# EAGLE board 14061-gatorBytes_LED_board-Panel (EAGLE 9.1.0)
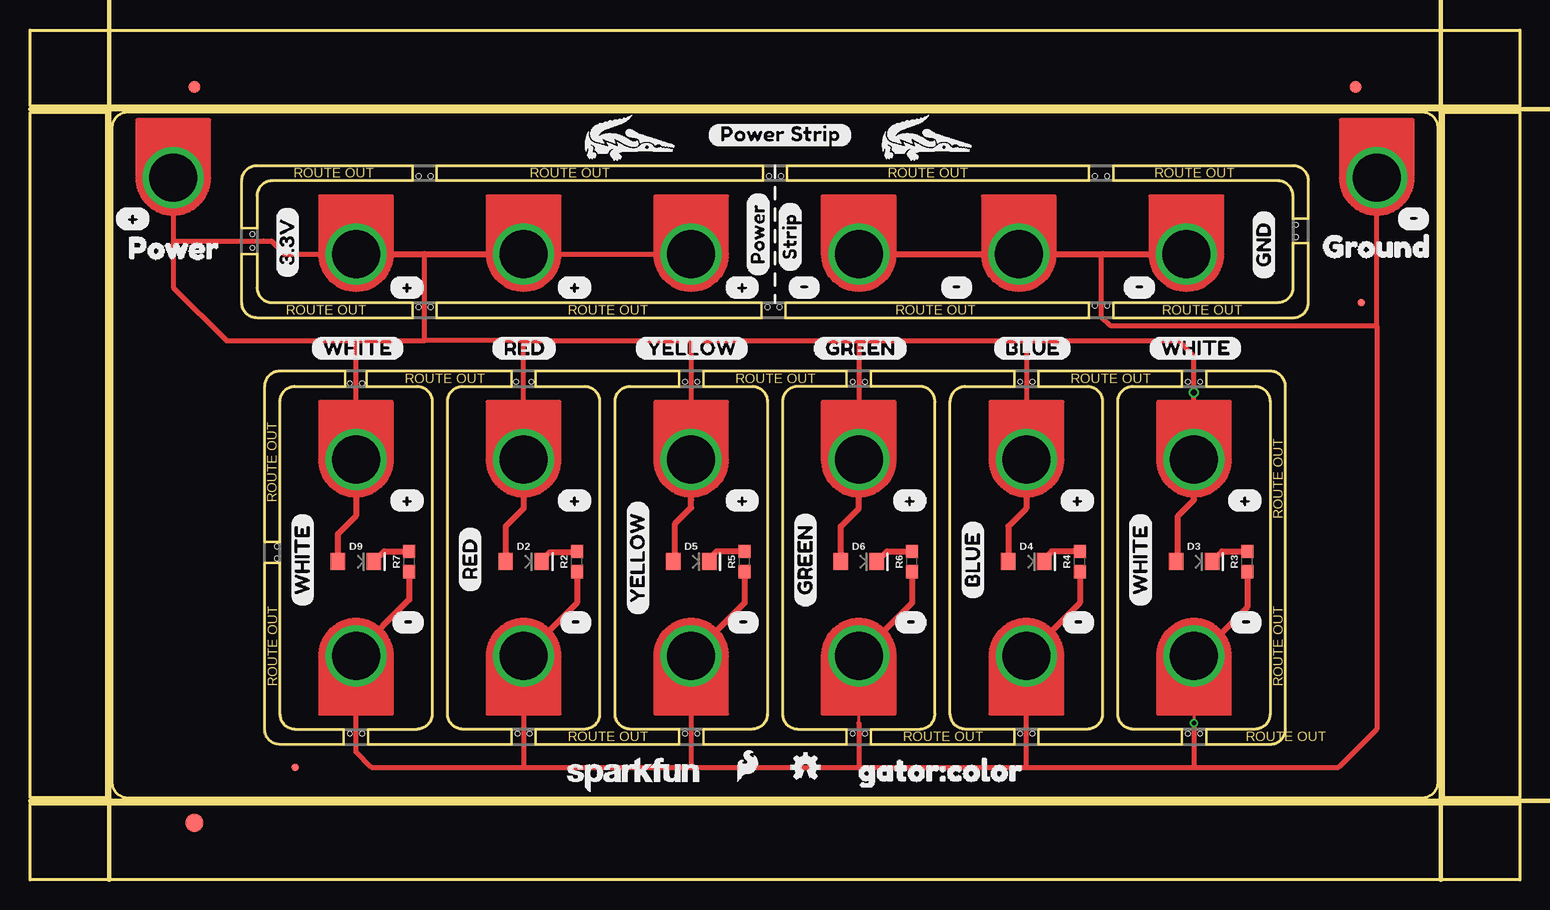
[diagram p0: board, top side]
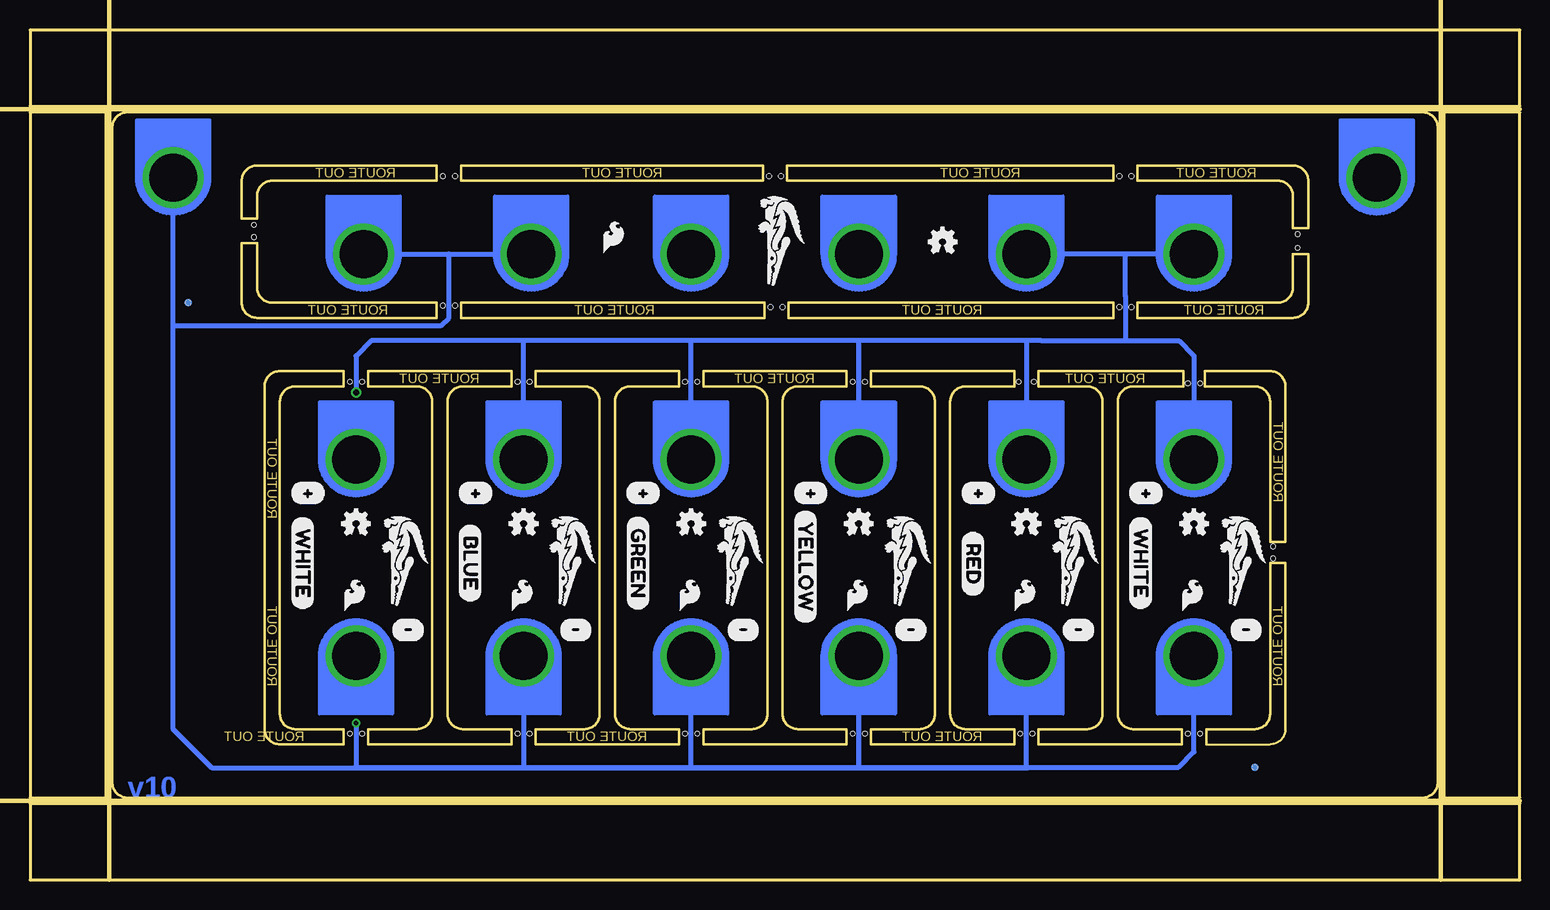
[diagram p1: board, bottom side, seen from below]

Size 124.21 x 70.87 mm. Coordinates in mm from the lower left corner, seen from the top.
Outline: 22.1,12.57 arc-90 20.83,13.84 20.83,26.42 19.56,26.42 19.56,12.57 arc90 20.83,11.3 26.16,11.3 26.16,12.57 22.1,12.57
Outline: 20.83,39.88 arc-90 22.1,41.15 26.29,41.15 26.29,42.42 20.83,42.42 arc90 19.56,41.15 19.56,28.19 20.83,28.19 20.83,39.88
Outline: 28.19,12.57 28.19,11.3 40.13,11.3 40.13,12.57 36.07,12.57 arc-90 34.8,13.84 34.8,39.88 arc-90 36.07,41.15 40.13,41.15 40.13,42.42 28.07,42.42 28.07,41.15 32.26,41.15 arc-90 33.53,39.88 33.53,13.84 arc-90 32.26,12.57 28.19,12.57
Outline: 6.86,8.13 6.86,62.74 arc-90 8.13,64.01 116.08,64.01 arc-90 117.35,62.74 117.35,8.13 arc-90 116.08,6.86 8.13,6.86 arc-90 6.86,8.13
Outline: 105.28,49.4 arc-90 104.01,48.13 90.3,48.13 90.3,46.86 105.28,46.86 arc90 106.55,48.13 106.55,53.09 105.28,53.09 105.28,49.4
Outline: 20.19,48.13 arc-90 18.92,49.4 18.92,52.2 17.65,52.2 17.65,48.13 arc90 18.92,46.86 31.88,46.86 31.88,48.13 20.19,48.13
Outline: 104.65,41.15 arc90 103.38,42.42 98.04,42.42 98.04,41.15 102.11,41.15 arc-90 103.38,39.88 103.38,13.84 arc-90 102.11,12.57 98.04,12.57 98.04,11.3 103.38,11.3 arc90 104.65,12.57 104.65,41.15
Outline: 42.16,12.57 42.16,11.3 54.1,11.3 54.1,12.57 50.04,12.57 arc-90 48.77,13.84 48.77,39.88 arc-90 50.04,41.15 54.1,41.15 54.1,42.42 42.16,42.42 42.16,41.15 46.23,41.15 arc-90 47.5,39.88 47.5,13.84 arc-90 46.23,12.57 42.16,12.57
Outline: 56.13,12.57 56.13,11.3 68.07,11.3 68.07,12.57 64.01,12.57 arc-90 62.74,13.84 62.74,39.88 arc-90 64.01,41.15 68.07,41.15 68.07,42.42 56.13,42.42 56.13,41.15 60.2,41.15 arc-90 61.47,39.88 61.47,13.84 arc-90 60.2,12.57 56.13,12.57
Outline: 70.1,12.57 70.1,11.3 82.04,11.3 82.04,12.57 77.98,12.57 arc-90 76.71,13.84 76.71,39.88 arc-90 77.98,41.15 82.04,41.15 82.04,42.42 70.1,42.42 70.1,41.15 74.17,41.15 arc-90 75.44,39.88 75.44,13.84 arc-90 74.17,12.57 70.1,12.57
Outline: 84.07,12.57 84.07,11.3 96.01,11.3 96.01,12.57 91.95,12.57 arc-90 90.68,13.84 90.68,39.88 arc-90 91.95,41.15 96.01,41.15 96.01,42.42 84.07,42.42 84.07,41.15 88.14,41.15 arc-90 89.41,39.88 89.41,13.84 arc-90 88.14,12.57 84.07,12.57
Outline: 33.91,48.13 33.91,46.86 60.96,46.86 60.96,48.13 33.91,48.13
Outline: 62.99,48.13 62.99,46.86 88.27,46.86 88.27,48.13 62.99,48.13
Outline: 17.65,54.36 18.92,54.36 18.92,57.02 arc-90 20.19,58.29 31.88,58.29 31.88,59.56 18.92,59.56 arc90 17.65,58.29 17.65,54.36
Outline: 33.91,58.29 33.91,59.56 61.09,59.56 61.09,58.29 33.91,58.29
Outline: 63.12,58.29 63.12,59.56 88.27,59.56 88.27,58.29 63.12,58.29
Outline: 90.3,58.29 90.3,59.56 105.28,59.56 arc-90 106.55,58.29 106.55,55.12 105.28,55.12 105.28,57.02 arc90 104.01,58.29 90.3,58.29
Outline: 0,6.35 124.21,6.35 124.21,0 0,0 0,6.35
Outline: 117.86,64.01 124.21,64.01 124.21,6.86 117.86,6.86 117.86,64.01
Outline: 0,70.87 124.21,70.87 124.21,64.52 0,64.52 0,70.87
Outline: 0,64.01 6.35,64.01 6.35,6.86 0,6.86 0,64.01
Copper layers (1*16): Top 0.035mm / dielectric 1.5mm / Bottom 0.035mm
Design rules "SparkFun-2-layer-PCBWay-LIMIT": minimum track width 6mil, minimum drill 0.3mm, track to track 6mil, track to pad 6mil, pad to pad 6mil, via to via 6mil, smd to smd 6mil, copper to edge 6mil, drill to drill 6mil, minimum pad ring 6mil, minimum via ring 6mil, stop-mask expansion 4mil, vias tented up to drill 25mil, thermal gap 10mil
Holes 0.38 mm at 32.38,47.75 61.59,58.67 33.4,47.75 61.47,47.75 88.77,47.88 62.48,47.75 89.79,47.88 105.54,54.61 105.54,53.59 26.67,41.4 27.69,41.4 40.51,41.53 41.78,41.53 54.61,41.53 55.63,41.53 68.58,41.53 69.6,41.53 82.55,41.53 83.57,41.53 96.52,41.53 97.54,41.53 96.52,12.19 97.54,12.19 82.55,12.19 83.57,12.19 68.58,12.19 69.6,12.19 54.61,12.19 55.63,12.19 40.64,12.19 41.66,12.19 26.67,12.19 27.69,12.19 20.57,27.81 20.57,26.8 18.54,52.7 18.54,53.85 62.61,58.67 32.38,58.67 33.4,58.67 88.77,58.67 89.79,58.67
Milling: 4 lines

## Footprints (pad centres in the part's own frame; a part is rotated, then mirrored left to right if it is on the bottom)
LED-1206 = smd 1.2 x 1.4: A -1.5,0; C 1.5,0
FIDUCIAL-1X2 = smd 1 x 1: 1 0,0
FIDUCIAL-1.5X3 = smd 1.5 x 1.5: 1 0,0
FIDUCIAL-MICRO = smd 0.635 x 0.635: 1 0,0
0603 = smd 1.1 x 1: 1 -0.85,0; 2 0.85,0
TAB_GATOR_MINI = drill 4 pad 5.08: P1 0,4.826

## Placement (x,y rotation side)
D2  RED  [LED-1206]  41.15,26.54 0 top
D3  WHITE  [LED-1206]  97.03,26.54 0 top
D4  BLUE  [LED-1206]  83.06,26.54 0 top
D5  Yellow  [LED-1206]  55.12,26.54 0 top
D6  GREEN  [LED-1206]  69.09,26.54 0 top
D9  WHITE  [LED-1206]  27.18,26.54 0 top
E$1  [FIDUCIAL-1X2]  13.72,66.1 0 top
E$2  [FIDUCIAL-1X2]  110.49,66.1 0 top
E$3  [FIDUCIAL-1.5X3]  13.72,4.76 0 top
FD1  FIDUCIALUFIDUCIAL  [FIDUCIAL-MICRO]  22.1,9.4 0 top
FD2  FIDUCIALUFIDUCIAL  [FIDUCIAL-MICRO]  22.1,9.4 0 bottom
FD3  FIDUCIALUFIDUCIAL  [FIDUCIAL-MICRO]  111,48.13 0 top
FD4  FIDUCIALUFIDUCIAL  [FIDUCIAL-MICRO]  111,48.13 0 bottom
LOGO1  SFE_LOGO_FLAME.1_INCH  [SFE_LOGO_FLAME_.1]  28.45,22.1 0 bottom
LOGO2  OSHW-LOGOMINI  [OSHW-LOGO-MINI]  27.18,29.72 0 bottom
LOGO3  OSHW-LOGOMINI  [OSHW-LOGO-MINI]  41.15,29.72 0 bottom
LOGO4  OSHW-LOGOMINI  [OSHW-LOGO-MINI]  55.12,29.72 0 bottom
LOGO5  OSHW-LOGOMINI  [OSHW-LOGO-MINI]  69.09,29.72 0 bottom
LOGO6  OSHW-LOGOMINI  [OSHW-LOGO-MINI]  83.06,29.72 0 bottom
LOGO7  OSHW-LOGOMINI  [OSHW-LOGO-MINI]  97.03,29.72 0 bottom
LOGO9  SFE_LOGO_FLAME.1_INCH  [SFE_LOGO_FLAME_.1]  42.42,22.1 0 bottom
LOGO10  SFE_LOGO_FLAME.1_INCH  [SFE_LOGO_FLAME_.1]  56.39,22.1 0 bottom
LOGO11  SFE_LOGO_FLAME.1_INCH  [SFE_LOGO_FLAME_.1]  70.36,22.1 0 bottom
LOGO12  SFE_LOGO_FLAME.1_INCH  [SFE_LOGO_FLAME_.1]  84.33,22.1 0 bottom
LOGO13  SFE_LOGO_FLAME.1_INCH  [SFE_LOGO_FLAME_.1]  98.3,22.1 0 bottom
LOGO15  OSHW-LOGOMINI  [OSHW-LOGO-MINI]  64.64,9.4 0 top
LOGO16  SFE_LOGO_NAME.1_INCH  [SFE_LOGO_NAME_.1]  44.32,6.86 0 top
LOGO17  SFE_LOGO_FLAME.1_INCH  [SFE_LOGO_FLAME_.1]  58.67,7.87 0 top
LOGO18  OSHW-LOGOMINI  [OSHW-LOGO-MINI]  48.13,53.21 0 bottom
LOGO19  SFE_LOGO_FLAME.1_INCH  [SFE_LOGO_FLAME_.1]  76.71,51.94 0 bottom
R2  330  [0603]  45.59,26.54 90 top
R3  330  [0603]  101.47,26.54 90 top
R4  150  [0603]  87.5,26.54 90 top
R5  330  [0603]  59.56,26.54 90 top
R6  150  [0603]  73.53,26.54 90 top
R7  330  [0603]  31.62,26.54 90 top
U$1  TAB_GATOR_MINI  [TAB_GATOR_MINI]  83.06,13.84 0 top
U$2  TAB_GATOR_MINI  [TAB_GATOR_MINI]  27.18,13.84 0 top
U$3  TAB_GATOR_MINI  [TAB_GATOR_MINI]  41.15,13.84 0 top
U$5  [POWER_STRIP0]  56.51,62.1 0 top
U$6  TAB_GATOR_MINI  [TAB_GATOR_MINI]  97.03,13.84 0 top
U$7  TAB_GATOR_MINI  [TAB_GATOR_MINI]  69.09,13.84 0 top
U$8  TAB_GATOR_MINI  [TAB_GATOR_MINI]  55.12,13.84 0 top
U$9  [GROUND3]  106.17,52.83 0 top
U$10  TAB_GATOR_MINI  [TAB_GATOR_MINI]  55.12,57.02 180 top
U$11  TAB_GATOR_MINI  [TAB_GATOR_MINI]  96.39,57.02 180 top
U$12  [#8]  32.89,49.4 180 top
U$13  TAB_GATOR_MINI  [TAB_GATOR_MINI]  55.12,39.88 180 top
U$14  [#8]  46.86,49.4 180 top
U$15  [#8]  60.83,49.4 180 top
U$16  TAB_GATOR_MINI  [TAB_GATOR_MINI]  69.09,39.88 180 top
U$17  [RED2]  45.59,29.08 270 bottom
U$18  TAB_GATOR_MINI  [TAB_GATOR_MINI]  41.15,39.88 180 top
U$19  TAB_GATOR_MINI  [TAB_GATOR_MINI]  97.03,39.88 180 top
U$20  TAB_GATOR_MINI  [TAB_GATOR_MINI]  83.06,39.88 180 top
U$21  TAB_GATOR_MINI  [TAB_GATOR_MINI]  27.18,57.02 180 top
U$22  [#9]  65.91,49.4 180 top
U$23  [#9]  78.61,49.4 180 top
U$24  [#9]  93.85,49.4 180 top
U$25  [3#3V1]  21.46,50.16 90 top
U$26  [GND0]  102.87,50.04 90 top
U$27  [POWER1]  60.71,50.29 90 top
U$28  TAB_GATOR_MINI  [TAB_GATOR_MINI]  82.42,57.02 180 top
U$29  [GATOR#PNG]  61.47,53.59 270 bottom
U$30  TAB_GATOR_MINI  [TAB_GATOR_MINI]  69.09,57.02 180 top
U$31  [GATOR#PNG]  74.42,61.98 0 top
U$32  TAB_GATOR_MINI  [TAB_GATOR_MINI]  11.94,63.37 180 top
U$33  TAB_GATOR_MINI  [TAB_GATOR_MINI]  27.18,39.88 180 top
U$34  TAB_GATOR_MINI  [TAB_GATOR_MINI]  41.15,57.02 180 top
U$35  [STRIP2]  63.37,50.67 90 top
U$36  [BLUE4]  80.26,44.32 0 top
U$37  [BLUE4]  78.61,23.37 90 top
U$38  TAB_GATOR_MINI  [TAB_GATOR_MINI]  112.27,63.37 180 top
U$39  [GREEN3]  65.28,44.32 0 top
U$40  [GREEN3]  64.64,22.73 90 top
U$41  [RED2]  38.48,44.32 0 top
U$42  [RED2]  36.7,24 90 top
U$43  [POWER2]  6.6,52.7 0 top
U$44  [WHITE6]  93.22,44.32 0 top
U$45  [WHITE6]  23.37,44.32 0 top
U$46  [WHITE6]  92.58,22.73 90 top
U$47  [WHITE6]  22.73,22.73 90 top
U$48  [YELLOW5]  50.42,44.32 0 top
U$49  [YELLOW5]  50.67,22.1 90 top
U$50  [GATOR#PNG]  49.66,61.98 0 top
U$51  [GATOR#COLOR0]  67.44,9.14 0 top
U$53  [#8]  102.74,31.62 180 top
U$54  [#9]  102.74,21.46 180 top
U$55  [#8]  88.77,31.62 180 top
U$56  [#9]  88.77,21.46 180 top
U$57  [#8]  74.8,31.62 180 top
U$58  [#9]  74.8,21.46 180 top
U$60  [#8]  60.83,31.62 180 top
U$61  [#9]  60.83,21.46 180 top
U$62  [#8]  46.86,31.62 180 top
U$63  [#9]  46.86,21.46 180 top
U$64  [#8]  32.89,31.62 180 top
U$65  [#9]  32.89,21.46 180 top
U$67  [GREEN3]  73.53,30.35 270 bottom
U$68  [GATOR#PNG]  22.99,26.92 270 bottom
U$69  [GATOR#PNG]  36.96,26.92 270 bottom
U$70  [GATOR#PNG]  50.93,26.92 270 bottom
U$71  [GATOR#PNG]  64.9,26.92 270 bottom
U$72  [GATOR#PNG]  78.87,26.92 270 bottom
U$73  [GATOR#PNG]  92.84,26.92 270 bottom
U$75  [BLUE4]  87.5,29.72 270 bottom
U$76  [YELLOW5]  59.56,30.86 270 bottom
U$77  [#8]  10.03,55.12 180 top
U$78  [WHITE6]  101.47,30.35 270 bottom
U$79  [WHITE6]  31.62,30.35 270 bottom
U$81  [#8]  29.72,32.26 180 bottom
U$82  [#9]  21.46,20.83 180 bottom
U$83  [#8]  43.69,32.26 180 bottom
U$84  [#8]  57.66,32.26 180 bottom
U$85  [#8]  71.63,32.26 180 bottom
U$86  [#8]  85.6,32.26 180 bottom
U$87  [#8]  99.57,32.26 180 bottom
U$89  [#9]  35.43,20.83 180 bottom
U$90  [#9]  49.4,20.83 180 bottom
U$91  [#9]  63.37,20.83 180 bottom
U$92  [#9]  77.34,20.83 180 bottom
U$93  [#9]  91.31,20.83 180 bottom
U$95  [#9]  116.71,55.12 180 top

## Library data of the parts
D2 = SparkFun-LED; PROD_ID: DIO-09912
D3 D9 = SparkFun-LED; PROD_ID: DIO-09955
D4 = SparkFun-LED; PROD_ID: DIO-09911
D5 = SparkFun-LED; PROD_ID: DIO-09909
D6 = SparkFun-LED; PROD_ID: DIO-00862
E$1 E$2 FD1-FD4 LOGO1-LOGO7 LOGO9-LOGO13 LOGO15-LOGO19 = SparkFun-Aesthetics
E$3 = SparkFun-Retired
R2 R3 R5 R7 = SparkFun-Resistors; PROD_ID: RES-00818
R4 R6 = SparkFun-Resistors; PROD_ID: RES-11028
U$1-U$3 U$6-U$8 U$10 U$11 U$13 U$16 U$18-U$21 U$28 U$30 U$32-U$34 U$38 = SparkFun-Connectors
U$5 = buzzard_labels
U$9 U$43 = buzzard_labels (6)
U$12 U$14 U$15 U$17 U$22-U$26 U$36 U$37 U$39-U$42 U$44-U$49 U$53-U$58 U$60-U$65 U$67 U$75-U$79 U$81-U$87 U$89-U$93 U$95 = gatorbytes
U$27 U$35 = buzzard_labels1
U$29 U$31 U$50 U$68-U$73 = gator#PNG (6)
U$51 = buzzard_labels (9)

## Nets
3.3V: D2.A D3.A D4.A D5.A D6.A D9.A U$10.P1 U$13.P1 U$16.P1 U$18.P1 U$19.P1 U$20.P1 U$21.P1 U$32.P1 U$33.P1 U$34.P1
GND: R2.1 R3.1 R4.1 R5.1 R6.1 R7.1 U$1.P1 U$2.P1 U$3.P1 U$6.P1 U$7.P1 U$8.P1 U$11.P1 U$28.P1 U$30.P1 U$38.P1
N$1: D2.C R2.2
N$3: D3.C R3.2
N$4: D4.C R4.2
N$5: D5.C R5.2
N$6: D6.C R6.2
N$7: D9.C R7.2

## Tracks (layer width: path | path; a pad name or v marks a point on that pad's centre or on a via)
3.3V  (via drill 0.51)
  Top 0.254: 20.14,53.26 20.19,53.21 | U$20.P1 83.06,34.8 83.06,34.16
  Top 0.406: 27.18,44.96 16.38,44.96 11.94,49.4 11.94,53.21 11.94,53.26 | 27.18,44.96 32.89,44.96 | 41.15,44.96 55.12,44.96 | 55.12,44.96 69.09,44.96 | 41.15,44.96 32.89,44.96 | 32.89,52.2 32.89,48.64 32.89,44.96 | U$34.P1 U$10.P1 | 21.21,52.2 U$21.P1 | 21.21,52.2 20.19,53.21 21.21,52.2 | U$32.P1 11.94,53.26 | 11.94,53.26 19.47,53.26 20.14,53.26 | 83.06,44.96 95.76,44.96 97.03,43.69 v97.03,40.64 U$19.P1 | 69.09,44.96 83.06,44.96 | D9.A 25.85,26.54 | D5.A 53.79,26.54 | D3.A 95.7,26.54 | D4.A 81.76,26.54 | U$33.P1 27.18,37.97 | 27.18,37.97 27.18,39.24 | 27.18,37.97 27.18,44.96 | 83.06,44.96 83.06,34.8 | 55.12,44.96 U$13.P1 | 69.09,44.96 69.09,34.16 | U$18.P1 41.15,44.96
  Top 0.508: U$21.P1 32.89,52.2 U$34.P1 | 53.79,26.54 53.79,29.72 55.12,31.05 55.12,31.68 | U$16.P1 69.09,34.16 69.09,30.99 67.59,29.49 D6.A | 83.06,34.16 83.06,30.99 81.56,29.49 D4.A | 95.7,26.54 95.7,30.35 97.03,31.68 | D9.A 25.68,28.85 27.18,30.35 27.18,34.16 U$33.P1 | U$18.P1 41.15,31.68 | 55.12,31.68 U$13.P1 | 97.03,31.68 U$19.P1 97.03,31.68 | 55.12,31.68 U$13.P1 | U$13.P1 | 41.15,31.68 | 41.15,31.68 41.15,30.99 39.65,29.49 D2.A | U$18.P1
  Bottom 0.406: 32.89,44.96 39.12,44.96 39.24,44.96 39.88,44.96 41.15,44.96 | 32.89,44.96 28.45,44.96 27.18,43.69 U$33.P1 | 41.15,44.96 55.12,44.96 | 55.12,44.96 69.09,44.96 | 69.09,44.96 83.06,44.96 | U$21.P1 32.89,52.2 | 32.89,52.2 U$34.P1 | 83.06,44.96 95.76,44.96 97.03,43.69 v97.03,40.64 | 32.89,48.64 | 32.89,48.64 32.89,44.96 | U$20.P1 83.06,44.96 | U$13.P1 55.12,44.96 | U$16.P1 69.09,44.96 | 41.15,44.96 U$18.P1 | 32.89,48.64 32.89,52.2
GND  (via drill 0.38)
  Top 0.254: 27.18,21.25 27.18,18.92 U$2.P1 | U$6.P1 97.03,18.29 v97.03,13.08 | U$2.P1 | 69.09,13.08 U$7.P1 69.09,13.08
  Top 0.406: 41.15,9.4 28.45,9.4 27.18,10.67 U$2.P1 | 41.15,9.4 55.12,9.4 | 55.12,9.4 69.09,9.4 | 69.09,9.4 83.06,9.4 | 83.06,9.4 97.03,9.4 | 97.03,9.4 109.09,9.4 112.27,12.57 112.27,46.23 | v97.03,13.08 97.03,9.4 | 69.09,9.4 69.09,13.08 69.09,9.4 | 41.15,13.08 | 41.15,13.08 41.15,9.4 | 89.41,52.2 89.28,52.07 89.28,48.64 89.28,46.99 90.04,46.23 112.27,46.23 | 112.27,46.23 U$38.P1 | 83.06,9.4 U$1.P1 | U$8.P1 55.12,9.4 | U$3.P1 41.15,13.08
  Top 0.508: U$30.P1 U$28.P1 89.41,52.2 U$11.P1 | R7.1 31.62,23.37 27.18,18.92 | 45.59,23.11 U$3.P1 | 59.56,23.11 U$8.P1 | R3.1 101.47,22.73 97.03,18.29 | U$7.P1 70.36,19.94 U$7.P1 | 87.5,23.11 U$1.P1 | U$7.P1 73.53,23.11 | 87.5,23.11 U$1.P1 | 59.56,23.11 U$8.P1 | 45.59,23.11 U$3.P1 | 87.5,23.11 U$1.P1 | U$1.P1 87.5,23.11 | 87.5,23.11 | 59.56,23.11 | 45.59,23.11 | 45.59,23.11 U$3.P1 | 59.56,23.11 U$8.P1 | 59.56,23.11 U$8.P1 | 45.59,23.11 U$3.P1 | 45.59,23.11 U$3.P1 | 45.59,23.11 U$3.P1 | 59.56,23.11 | 87.5,23.11 U$1.P1 | 59.56,23.11 U$8.P1 | 59.56,23.11 U$8.P1 | 87.5,23.11 U$1.P1 | U$7.P1 73.53,23.11 | 45.59,23.11 U$3.P1 | 59.56,23.11 U$8.P1 | R4.1 87.5,23.11 | R6.1 73.53,23.11 | R5.1 59.56,23.11 | R2.1 45.59,23.11
  Bottom 0.406: 41,9.35 109.06,9.35 112.27,12.55 112.27,46.23 | 41.15,9.4 28.45,9.4 27.18,10.67 U$2.P1 | v97.03,13.08 97.03,9.4 83.06,9.4 | 89.28,52.2 89.28,48.64 89.28,46.86 | 89.28,52.2 U$28.P1 | 112.27,46.23 89.92,46.23 | 55.12,9.4 41.15,9.4 | 69.09,9.4 55.12,9.4 | 83.06,9.4 69.09,9.4 | U$11.P1 89.28,52.2 | 89.92,46.23 89.28,46.86 | 112.27,46.23 89.92,46.23 | 89.92,46.23 89.28,46.86 | 112.27,46.23 | 112.27,46.23 U$38.P1 | 112.27,46.23 | U$1.P1 83.06,9.4 | 55.12,9.4 U$8.P1 | 41.15,9.4 U$3.P1 | 69.09,9.4 69.09,13.84
N$1
  Top 0.508: R2.2 45.54,27.34 43.33,27.34 42.59,26.6 D2.C
N$3
  Top 0.508: D3.C 99.38,27.39 R3.2
N$4
  Top 0.406: D4.C 84.47,26.63
  Top 0.508: R4.2 85.18,27.39 84.56,26.77 D4.C
N$5
  Top 0.508: R5.2 57.24,27.39 56.62,26.77 D5.C
N$6
  Top 0.406: D6.C 70.5,26.63
  Top 0.508: D6.C 71.44,27.39 R6.2
N$7
  Top 0.508: D9.C 29.53,27.39 R7.2

## Text on the board
Bottom: v10
Dimension: ROUTE OUT | ROUTE OUT | ROUTE OUT | ROUTE OUT | ROUTE OUT | ROUTE OUT | ROUTE OUT | ROUTE OUT | ROUTE OUT | ROUTE OUT | ROUTE OUT | ROUTE OUT | ROUTE OUT | ROUTE OUT | ROUTE OUT | ROUTE OUT | ROUTE OUT | ROUTE OUT
Milling: v-score | v-score | v-score | v-score